# EAGLE board untitled (EAGLE 6.4)

Size 100 x 80 mm. Coordinates in mm from the lower left corner, seen from the top.
Outline: 0,0 100,0 100,80 0,80 0,0
Copper layers (1*16): Top 0.035mm / dielectric 1.5mm / Bottom 0.035mm
Design rules "default": minimum track width 10mil, minimum drill 24mil, track to track 8mil, track to pad 8mil, pad to pad 8mil, via to via 8mil, smd to smd 8mil, copper to edge 40mil, drill to drill 8mil, minimum pad ring 10mil, minimum via ring 8mil, stop-mask expansion 4mil, vias tented up to drill 0mil, thermal gap 10mil

## Footprints (pad centres in the part's own frame; a part is rotated, then mirrored left to right if it is on the bottom)
C0805 = smd 1.3 x 1.5: 1 -0.95,0; 2 0.95,0
C = smd 2.55 x 2.5: + 2.525,0; - -2.525,0
SOT23 = smd 1 x 1.4: 1 -0.95,-1.1; 2 0.95,-1.1; 3 0,1.1
SMA = smd 1.8 x 1.7: A -2.05,0; K 2.05,0
0805 = smd 1.3 x 1.5: 1 -0.95,0; 2 0.95,0
MA03-2 = drill 0.889 pad 1.651 square: 1 -2.54,-1.27; 2 -2.54,1.27; 3 0,-1.27; 4 0,1.27; 5 2.54,-1.27; 6 2.54,1.27
MA04-2 = drill 0.889 pad 1.651 square: 1 -3.81,-1.27; 2 -3.81,1.27; 3 -1.27,-1.27; 4 -1.27,1.27; 5 1.27,-1.27; 6 1.27,1.27; 7 3.81,-1.27; 8 3.81,1.27
MA02-2 = drill 0.889 pad 1.651 square: 1 -1.27,-1.27; 2 -1.27,1.27; 3 1.27,-1.27; 4 1.27,1.27
SO8 = smd 1.981 x 0.559: 1 -2.464,1.905; 2 -2.464,0.635; 3 -2.464,-0.635; 4 -2.464,-1.905; 5 2.464,-1.905; 6 2.464,-0.635; 7 2.464,0.635; 8 2.464,1.905

## Placement (x,y rotation side)
C1  100nF  [C0805]  -15.24,-24.13 0 top  (outside the outline)
C2  47uF  [C]  -12.7,-29.21 0 top  (outside the outline)
C3  [C]  -12.7,-41.91 0 top  (outside the outline)
C4  [C]  -12.7,-48.26 0 top  (outside the outline)
C5  [C]  -12.7,-54.61 0 top  (outside the outline)
C6  100nF  [C0805]  -15.24,-80.01 0 top  (outside the outline)
C7  1uF  [C0805]  -15.24,-86.36 0 top  (outside the outline)
D1  TS2431A  [SOT23]  5.08,6.35 0 top
D2  M4  [SMA]  -13.97,-19.05 0 top  (outside the outline)
D3  TS2431A  [SOT23]  -15.24,-3.81 0 top  (outside the outline)
R1  [0805]  -15.24,-59.69 0 top  (outside the outline)
SV1  [MA03-2]  -12.7,-12.7 0 top  (outside the outline)
SV2  [MA04-2]  -11.43,-35.56 0 top  (outside the outline)
SV3  [MA04-2]  -11.43,-66.04 0 top  (outside the outline)
SV4  [MA02-2]  -13.97,-73.66 0 top  (outside the outline)
SV5  [MA03-2]  -12.7,-95.25 0 top  (outside the outline)
U1  MCP1541T  [SOT23]  24.13,7.62 0 top
U2  TC682E  [SO8]  45.72,5.08 0 top

## Library data of the parts
C1-C7 = moje_C
D1 D3 U1 = moje_diody
D2 = moje
R1 = moje_R
SV1-SV3 SV5 = moje_hrebinky; OC_FARNELL: unknown; OC_NEWARK: unknown
SV4 = moje_hrebinky
U2 = moje_io

## Nets
+5V: C1.1 C2.+ C6.1 D2.K SV1.3 SV1.4 U1.1 U2.6
-VCC: C5.+ R1.1 SV2.3 SV2.4 SV2.5 SV2.6 U2.4
GND: C1.2 C2.- C5.- C6.2 C7.2 D1.1 D1.2 D2.A SV1.1 SV1.2 SV1.5 SV1.6 SV2.1 SV2.2 SV2.7 SV2.8 SV3.1 SV3.2 SV3.7 SV3.8 SV5.1 SV5.2 SV5.5 SV5.6 U1.3 U2.5
N$1: C3.- U2.1
N$2: C3.+ U2.7
N$3: C4.+ U2.2
N$4: C4.- U2.3
N$5: D3.3 R1.2 SV3.5 SV3.6 SV4.3 SV4.4
N$6: D1.3 D3.1 D3.2 SV3.3 SV3.4 SV4.1 SV4.2
N$10: C7.1 SV5.3 SV5.4 U1.2

## Tracks (layer width: path | path; a pad name or v marks a point on that pad's centre or on a via)
+5V  (7 unrouted)
-VCC  (6 unrouted)
GND  (25 unrouted)
N$1  (1 unrouted)
N$2  (1 unrouted)
N$3  (1 unrouted)
N$4  (1 unrouted)
N$5  (5 unrouted)
N$6  (6 unrouted)
N$10  (3 unrouted)